# Altium PCB minna_pcb.PcbDoc (part 2 of 2)
Units mil, origin at the board's own origin, x right, y up, seen from the top; angles counter-clockwise.
Board outline 3700 x 2200 mil, 4 copper layers (Top Layer, Power Plane, Ground Plane, Bottom Layer), stack 61.6 mil thick; 144 components, 126 nets, 666 pads, 364 vias.
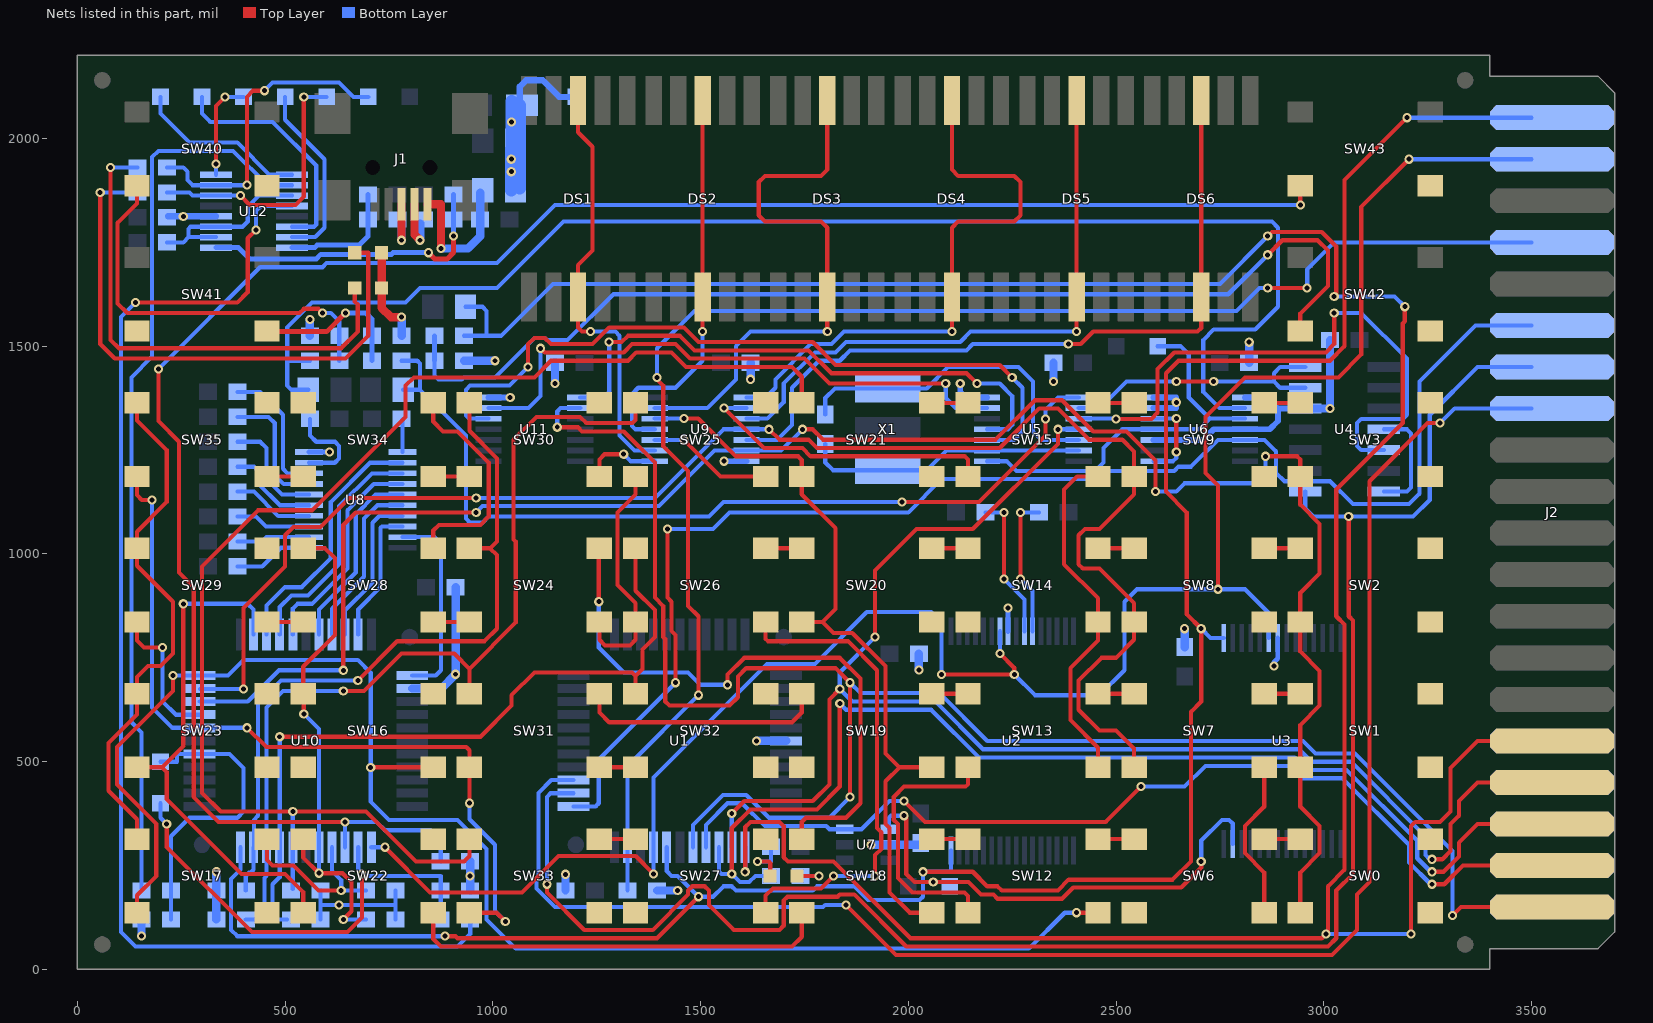
[diagram p4: the nets of this part, all layers, seen from the top]

## Via types
v1: diameter 22, hole 12, Top Layer to Bottom Layer, 364 vias

## Nets (pads, with @x,y where several pads share a name; then routed paths per layer and width w, separated by ;. In a path a pad name is that pad's centre, name@x,y a point inside that pad or via, vN(x,y) a via of type N, cw(c..) or ccw(c..) an arc to the next point about the centre after c; other vN are vias at no path point) (continued)
H\A\L\T\: J2.18 R2.2 U1.14 | length 2736.5
  Top Layer w10: v1(1575,230) 1575,340 1620,385 1780,385 1835,440 v1(1835,640) ; v1(3260,235) 3288,235 3325,272 3325,305 3370,350 J2.18@3500,350
  Bottom Layer w10: U1.14@1544.49,294.09 1544.49,235.51 1550,230 v1(1575,230) 1595,210 1617,210 1632,225 R2.2@1669.57,225 ; v1(1835,640) 1850,625 2055,625 2170,510 2930,510 2960,480 3055,480 3225,310 3225,267.47 3257.47,235 v1(3260,235)
I2CSCL: R30.1 R33.2 TP1.TP U10.5 | length 737.1
  Bottom Layer w10: TP1.TP@200,500 240,500 240,518.5 U10.5@294.09,518.5 366.5,518.5 400,485 400,380 385,365 270,365 225.43,320.43 R33.2@225.43,190 R30.1@225.43,120
I2CSDA: R31.1 R35.2 TP2.TP U10.35 | length 1150.1
  Top Layer w10: v1(215,350) 215,295 420,90 650,90 685,125 v1(685,230)
  Bottom Layer w10: TP2.TP@200,400 200,365 v1(215,350) ; U10.35@675.98,294.09 675.98,239.02 690,225 874.57,225 R31.1@874.57,190 R35.2@874.57,120
I\N\T\: C13.2 J2.16 R29.2 U1.12 | length 6874.8
  Top Layer w10: v1(1607.48,235) 1607.48,342.48 1620,355 1690,355 1700,345 1700,270 1710,260 1820,260 2005,75 2995,75 v1(3005,85) 3010,90 3010,200 3050,240 3050,830 3030,850 3030,1155 3190,1315 3190,1555 3195,1560 v1(3195,1595) ; v1(2865,1765) 2875,1775 2995,1775 3030,1740 3030,1625 v1(3025,1620) ; v1(3210,85) 3210,345 3220,355 3280,355 3305,380 3305,485 3370,550 J2.16@3500,550
  Bottom Layer w10: R29.2@930.43,1525 985,1525 ; C13.2@934.37,1595 975,1595 985,1585 985,1525 ; v1(1607.48,235) U1.12@1607.48,294.09 ; v1(2865,1765) 2750,1650 1145,1650 1020,1525 985,1525 ; v1(3005,85) v1(3210,85) ; v1(3025,1620) 3170,1620 v1(3195,1595)
I\O\R\Q\: J2.20 U1.16 U11.2 | length 4233.9
  Top Layer w10: v1(1155,1305) 1205,1305 1215,1295 1315,1295 1390,1220 1390,895 1410,875 1410,800 1415,795 1415,645 1425,635 1570,635 1590,655 1590,705 1610,725 1825,725 v1(1860,690) v1(1860,415) ; v1(3310,130) 3330,150 J2.20@3500,150
  Bottom Layer w10: v1(1155,1305) 1155,1343 1163.18,1351.18 U11.2@1210.24,1351.18 ; U1.16@1481.5,294.09 1481.5,347.5 1554,420 1610,420 1665,365 1810,365 v1(1860,415) ; v1(1860,690) 1885,665 2075,665 2190,550 2950,550 2980,520 3075,520 3310,285 v1(3310,130)
M\1\: J2.34 U1.24 U4.1 | length 4377.4
  Top Layer w10: v1(1130,205) 1130,185 1220,95 1385,95 1470,180 1470,190 1480,200 1510,200 1520,190 1520,155 1580,95 1690,95 1700,105 1700,165.99 1709.01,175 1830,175 1835,180 1870,180 1995,55 3010,55 3030,75 3030,190 3070,230 3070,840 3060,850 v1(3060,1090)
  Bottom Layer w10: v1(1130,205) 1130,415 1139.02,424.02 U1.24@1194.09,424.02 ; U4.1@2955.51,1150 2955.51,1109.49 2975,1090 v1(3060,1090) 3215,1090 3255,1130 3255,1335 3370,1450 J2.34@3500,1450
M\R\E\Q\: J2.19 U1.15 U7.3 | length 2354.6
  Top Layer w10: v1(1990,405) 2040,355 2475,355 v1(2560,440) ; v1(3260,205) 3290,205 3335,250 J2.19@3500,250
  Bottom Layer w10: U1.15@1512.99,294.09 1512.99,347.99 1565,400 1600,400 1655,345 1802.4,345 1810,337.4 U7.3@1846.85,337.4 1887.4,337.4 1955,405 v1(1990,405) ; v1(2560,440) 2665,440 2715,490 2920,490 2950,460 3045,460 3205,300 3205,257.47 3257.47,205 v1(3260,205)
NetC12_2: C12.2 R27.2 U5.1 | length 2147.2
  Top Layer w10: v1(1985,1125) 2170,1125 2330,1285 v1(2330,1325)
  Bottom Layer w10: R27.2@780.43,1465 818,1465 825,1458 825,1395 ; C12.2@784.37,1395 825,1395 ; v1(1985,1125) 1555,1125 1520,1090 990,1090 975,1075 945,1075 935,1085 935,1285 825,1395 ; v1(2330,1325) 2330,1346.77 2360,1376.77 U5.1@2410.24,1376.77
NetC14_1: C14.1 J1.1 L1.1 | length 350.2
  Top Layer w20: J1.1@842.99,1841.42 875,1841.42 v1(875,1735)
  Bottom Layer w20: v1(875,1735) 940,1735 970,1765 L1.1@970,1869.37
NetC15_1: C15.1 R34.2 U12.8 | length 294.7
  Bottom Layer w12: U12.8@516.54,1737.5 571.5,1737.5 577,1743 678,1743 699.57,1764.57 R34.2@699.57,1805 C15.1@699.57,1865
NetC16_1: C16.1 R32.2 U12.9 | length 741.7
  Top Layer w12: v1(845,1725) 860,1710 890,1710 905.43,1725.43 v1(905.43,1765.43)
  Bottom Layer w12: U12.9@333.46,1737.5 387.5,1737.5 415,1710 575,1710 586,1721 756,1721 760,1725 v1(845,1725) ; v1(905.43,1765.43) R32.2@905.43,1805 C16.1@905.43,1865
NetC17_2: C17.2 U12.3 U12.10 U12.11 | length 445.9
  Bottom Layer w10: C17.2@215.43,1750 255,1750 267.5,1762.5 ; U12.10@333.46,1762.5 267.5,1762.5 ; U12.3@516.54,1862.5 437.5,1862.5 410,1835 410,1800 397.5,1787.5 U12.11@333.46,1787.5 272.5,1787.5 267.5,1782.5 267.5,1762.5
NetC20_2: C20.2 R28.2 U6.2 | length 3390.6
  Bottom Layer w10: C20.2@555.63,1395 515,1395 505,1405 505,1465 ; R28.2@559.57,1465 505,1465 ; U6.2@2810.24,1351.18 2748.82,1351.18 2710,1390 2710,1515 2735,1540 2835,1540 2890,1595 2890,1785 2875,1800 1170,1800 1010,1640 825,1640 790,1605 565,1605 505,1545 505,1465
NetD1_2: D1.2 R2.1 | length 97.1
  Top Layer w10: D1.2@1732.48,225 v1(1785,225)
  Bottom Layer w10: R2.1@1740.43,225 v1(1785,225)
NetD2_2: D2.2 R36.2 | length 1207.5
  Top Layer w10: v1(80,1930) 80,1515 100,1495 635,1495 675,1535 675,1600 667.52,1607.48 D2.2@667.52,1640
  Bottom Layer w10: v1(80,1930) R36.2@144.57,1930
NetD3_2: D3.2 R37.1 | length 1369.3
  Top Layer w10: v1(55,1870) 55,1505 90,1470 645,1470 700,1525 700,1725 D3.2@667.52,1725
  Bottom Layer w10: v1(55,1870) R37.1@144.57,1870
NetDS1_3: DS1.3 DS1.8 U9.2 | length 1023.2
  Top Layer w10: DS1.8@1205,2091.22 1205,2015 1240,1980 1240,1730 1205,1695 DS1.3@1205,1618.78 1205,1545 1215,1535 v1(1235,1535)
  Bottom Layer w10: v1(1235,1535) 1295,1535 1305,1525 1305,1285 1341.18,1248.82 U9.2@1389.76,1248.82
NetDS2_3: DS2.3 DS2.8 U9.4 | length 964.4
  Top Layer w10: v1(1505,1535) DS2.3@1505,1618.78 DS2.8@1505,2091.22
  Bottom Layer w10: U9.4@1389.76,1300 1343,1300 1335,1308 1335,1385 1350,1400 1440,1400 1505,1465 v1(1505,1535)
NetDS3_3: DS3.3 DS3.8 U9.6 | length 1389.3
  Top Layer w10: v1(1805,1535) DS3.3@1805,1618.78 1805,1785 1790,1800 1655,1800 1640,1815 1640,1895 1655,1910 1790,1910 1805,1925 DS3.8@1805,2091.22
  Bottom Layer w10: U9.6@1389.76,1351.18 1516.18,1351.18 1585,1420 1585,1500 1620,1535 v1(1805,1535)
NetDS4_3: DS4.3 DS4.8 U9.8 | length 1423.1
  Top Layer w10: v1(2105,1535) DS4.3@2105,1618.78 2105,1785 2120,1800 2255,1800 2270,1815 2270,1895 2255,1910 2120,1910 2105,1925 DS4.8@2105,2091.22
  Bottom Layer w10: U9.8@1610.24,1376.77 1656.77,1376.77 1680,1400 1680,1420 1765,1505 1815,1505 1845,1535 v1(2105,1535)
NetDS5_3: DS5.3 DS5.8 U9.10 | length 1464.1
  Top Layer w10: v1(2405,1535) DS5.3@2405,1618.78 DS5.8@2405,2091.22
  Bottom Layer w10: U9.10@1610.24,1325.59 1660.59,1325.59 1700,1365 1700,1410 1775,1485 1825,1485 1850,1510 2125,1510 2150,1535 v1(2405,1535)
NetDS6_3: DS6.3 DS6.8 U9.12 | length 1806.3
  Top Layer w10: v1(2385,1505) 2415,1505 2445,1535 2695.96,1535 2705,1544.04 DS6.3@2705,1618.78 DS6.8@2705,2091.22
  Bottom Layer w10: U9.12@1610.24,1274.41 1684.41,1274.41 1720,1310 1720,1400 1785,1465 1835,1465 1860,1490 2140,1490 2155,1505 v1(2385,1505)
NetJ1_2: J1.2 R32.1 | length 132.4
  Top Layer w20: J1.2@811.5,1841.42 811.5,1768.5 v1(825,1755)
  Bottom Layer w20: v1(825,1755) R32.1@825,1795.43
NetJ1_3: J1.3 R34.1 | length 126.9
  Top Layer w20: v1(780,1755) J1.3@780,1841.42
  Bottom Layer w20: v1(780,1755) R34.1@780,1795.43
NetR1_1: R1.1 R27.1 SW41.3 SW41.4 | length 376.5
  Top Layer w12: SW41.4@457.91,1535 600,1535 v1(645,1580)
  Bottom Layer w12: v1(645,1580) 694.57,1580 709.57,1565 R1.1@709.57,1525 R27.1@709.57,1465
NetR3_1: R3.1 R28.1 SW40.3 SW40.4 | length 957
  Top Layer w10: SW40.3@143.5,1886.42 143.5,1843.5 97,1797 97,1603 120,1580 535,1580 545,1590 580,1590 v1(590,1580)
  Bottom Layer w10: v1(590,1580) 610,1580 630.43,1559.57 R3.1@630.43,1525 R28.1@630.43,1465
NetR6_2: R6.2 U2.11 | length 342.9
  Top Layer w10: v1(2270,940) v1(2270,1100)
  Bottom Layer w10: v1(2270,940) 2299.21,910.79 U2.11@2299.21,813.78 ; v1(2270,1100) R6.2@2314.57,1100
NetR7_2: R7.2 U2.10 | length 351.3
  Top Layer w10: v1(2230,940) v1(2230,1100)
  Bottom Layer w10: R7.2@2185.43,1100 v1(2230,1100) ; v1(2230,940) 2279.53,890.47 U2.10@2279.53,813.78
NetR8_1: R8.1 U5.5 X1.3 | length 823.9
  Bottom Layer w10: R8.1@1800,1335.43 1800,1375 1823.43,1398.43 X1.3@1950,1398.43 2044.43,1398.43 2096,1450 2265,1450 2300,1415 2300,1295 2320.59,1274.41 U5.5@2410.24,1274.41
NetR8_2: R8.2 U5.6 U5.9 X1.1 | length 682
  Bottom Layer w10: R8.2@1800,1264.57 1800,1220 1818.43,1201.57 X1.1@1950,1201.57 2044.57,1201.57 2091.82,1248.82 U5.9@2189.76,1248.82 U5.6@2410.24,1248.82
NetR9_1: R9.1 R29.1 SW42.3 SW42.4 | length 2624.3
  Top Layer w10: v1(2865,1720) 2900,1755 2985,1755 3010,1730 3010,1645 2943.5,1578.5 SW42.3@2943.5,1536.42
  Bottom Layer w10: R9.1@859.57,1465 859.57,1429.43 869,1420 925,1420 930,1425 1005,1425 1100,1520 1125,1520 1130,1515 1180,1515 1290,1625 2770,1625 v1(2865,1720)
  Bottom Layer w12: R9.1@859.57,1465 R29.1@859.57,1525
NetR11_1: R11.1 U8.18 | length 329.7
  Bottom Layer w10: R11.1@385.43,1390 440,1390 495,1335 495,1205 506.02,1193.98 U8.18@557.8,1193.98
NetR12_1: R12.1 U8.17 | length 312.5
  Bottom Layer w10: R12.1@385.43,1330 460,1330 475,1315 475,1190 496.61,1168.39 U8.17@557.8,1168.39
NetR13_1: R13.1 U8.16 | length 269
  Bottom Layer w10: R13.1@385.43,1270 440,1270 455,1255 455,1180 492.2,1142.8 U8.16@557.8,1142.8
NetR14_1: R14.1 U8.15 | length 228.4
  Bottom Layer w10: R14.1@385.43,1210 425,1210 435,1200 435,1170 487.8,1117.2 U8.15@557.8,1117.2
NetR15_1: R15.1 U8.14 | length 196.5
  Bottom Layer w10: R15.1@385.43,1150 425,1150 483.39,1091.61 U8.14@557.8,1091.61
NetR16_1: R16.1 U8.13 | length 182.3
  Bottom Layer w10: R16.1@385.43,1090 430,1090 453.98,1066.02 U8.13@557.8,1066.02
NetR17_1: R17.1 U8.12 | length 176.7
  Bottom Layer w10: R17.1@385.43,1030 445,1030 455.43,1040.43 U8.12@557.8,1040.43
NetR18_1: R18.1 U8.11 | length 190.9
  Bottom Layer w10: R18.1@385.43,970 445,970 489.84,1014.84 U8.11@557.8,1014.84
NetR25_1: R25.1 U8.1 | length 78.1
  Bottom Layer w10: U8.1@782.2,1245.16 R25.1@782.2,1323.23
NetR26_1: R26.1 U8.19 | length 227.1
  Bottom Layer w10: U8.19@557.8,1219.57 619.57,1219.57 630.01,1230.01 630.01,1259.99 620,1270 575,1270 559.57,1285.43 R26.1@559.57,1325
NetR33_1: R33.1 U12.2 | length 2172.8
  Bottom Layer w10: R33.1@154.57,190 154.57,570.43 130,595 130,1425 180,1475 180,1955 195,1970 375,1970 457.5,1887.5 U12.2@516.54,1887.5
NetR35_1: R35.1 U12.4 | length 3007
  Top Layer w10: v1(140,1605) 385,1605 410,1630 410,1760 v1(430,1780)
  Bottom Layer w10: v1(140,1605) 105,1570 105,90 140,55 915,55 945.43,85.43 R35.1@945.43,120 ; v1(430,1780) 430,1825 442.5,1837.5 U12.4@516.54,1837.5
NetR36_1: R36.1 TP3.TP U12.15 | length 755.1
  Top Layer w10: v1(407.98,1888.03) 407.98,2100 422.98,2115 v1(450,2115)
  Bottom Layer w10: R36.1@215.43,1930 255,1930 265,1920 265,1900 277.5,1887.5 U12.15@333.46,1887.5 407.46,1887.5 v1(407.98,1888.03) ; v1(450,2115) 470,2135 630,2135 665,2100 TP3.TP@700,2100
NetR37_2: R37.2 TP4.TP U12.14 | length 645.3
  Top Layer w10: v1(392.5,1862.5) 415,1840 525,1840 545,1860 v1(545,2100)
  Bottom Layer w10: R37.2@215.43,1870 270,1870 277.5,1862.5 U12.14@333.46,1862.5 v1(392.5,1862.5) ; v1(545,2100) TP4.TP@600,2100
NetTP5_TP: TP5.TP U12.7 | length 442.1
  Bottom Layer w10: TP5.TP@500,2100 500,2045 595,1950 595,1785 572.5,1762.5 U12.7@516.54,1762.5
NetTP6_TP: TP6.TP U12.16 | length 241.4
  Top Layer w10: v1(333.46,1938.46) 333.46,2078.46 v1(355,2100)
  Bottom Layer w10: U12.16@333.46,1912.5 v1(333.46,1938.46) ; v1(355,2100) TP6.TP@400,2100
NetTP7_TP: TP7.TP U12.6 | length 569.5
  Bottom Layer w10: TP7.TP@300,2100 300,2060 320,2040 470,2040 575,1935 575,1793 569.5,1787.5 U12.6@516.54,1787.5
NetTP8_TP: TP8.TP U12.1 | length 417.6
  Bottom Layer w10: TP8.TP@200,2100 200,2060 270,1990 385,1990 462.5,1912.5 U12.1@516.54,1912.5
NetTP9_TP: TP9.TP U5.8 U6.3 U6.11 | length 961.3
  Bottom Layer w10: U5.8@2189.76,1223.23 2236.77,1223.23 2260,1200 2450,1200 2470,1220 2470,1255 2515,1300 U6.11@2589.76,1300 2700,1300 2725.59,1325.59 ; TP9.TP@2600,1500 2655,1500 2675,1480 2675,1376.18 2725.59,1325.59 ; U6.3@2810.24,1325.59 2725.59,1325.59
NetU4_6: U4.6 U4.7 U5.2 | length 679.6
  Top Layer w10: v1(2645,1415) v1(2735,1415)
  Bottom Layer w10: U5.2@2410.24,1351.18 2461.18,1351.18 2525,1415 v1(2645,1415) ; v1(2735,1415) 2880,1415 ; U4.6@2955.51,1400 2895,1400 2880,1415 ; U4.7@2955.51,1450 2895,1450 2880,1435 2880,1415
NetU4_11: U4.11 U4.14 | length 269.3
  Bottom Layer w10: U4.14@3144.49,1150 3200,1150 3210,1160 3210,1290 3200,1300 U4.11@3144.49,1300
NetU4_12: U4.12 U5.3 | length 1433.6
  Top Layer w10: v1(2500,1325) 2585,1325 2600,1340 2600,1445 2640,1485 3005,1485 3025,1505 v1(3025,1580)
  Bottom Layer w10: U5.3@2410.24,1325.59 2499.41,1325.59 v1(2500,1325) ; v1(3025,1580) 3090,1580 3200,1470 3200,1335 3190,1325 3090,1325 3080,1315 3080,1260 3090,1250 U4.12@3144.49,1250
NetU5_10: U5.10 U11.12 | length 1825.4
  Top Layer w10: v1(1085,1450) 1085,1505 1100,1520 1125,1520 1140,1505 1240,1505 1280,1545 1460,1545 1495,1510 1770,1510 1825,1455 2220,1455 v1(2250,1425)
  Bottom Layer w10: U11.12@989.76,1325.59 942.41,1325.59 935,1333 935,1395 945,1405 1040,1405 v1(1085,1450) ; U5.10@2189.76,1274.41 2254.41,1274.41 2275,1295 2275,1400 v1(2250,1425)
NetU5_11: U5.11 U11.1 | length 1365.9
  Top Layer w10: v1(1280,1510) 1310,1510 1325,1525 1450,1525 1485,1490 1760,1490 1815,1435 2140,1435 v1(2165,1410)
  Bottom Layer w10: U11.1@1210.24,1376.77 1266.77,1376.77 1280,1390 v1(1280,1510) ; v1(2165,1410) 2220,1410 2250,1380 2250,1310 2240,1300 U5.11@2189.76,1300
NetU5_13: U5.13 U11.13 | length 1423.6
  Top Layer w10: v1(1115,1495) 1125,1485 1315,1485 1335,1505 1440,1505 1475,1470 1750,1470 1810,1410 v1(2090,1410)
  Bottom Layer w10: U11.13@989.76,1351.18 1086.18,1351.18 1115,1380 v1(1115,1495) ; v1(2090,1410) 2090,1375 2113.82,1351.18 U5.13@2189.76,1351.18
NetU6_8: U6.8 U6.12 | length 208.9
  Top Layer w10: v1(2645,1245) v1(2645,1325.59)
  Bottom Layer w10: U6.8@2589.76,1223.23 2637.23,1223.23 2645,1231 v1(2645,1245) ; U6.12@2590.35,1325.59 U6.12@2589.76,1325.59 v1(2645,1325.59)
NetU8_2: U8.2 U10.14 | length 617.9
  Bottom Layer w10: U10.14@455.51,805.91 455.51,875.51 500,920 540,920 610,990 610,1125 704.57,1219.57 U8.2@782.2,1219.57
NetU8_3: U8.3 U10.15 | length 576.7
  Bottom Layer w10: U10.15@487.01,805.91 487.01,872.01 515,900 555,900 630,975 630,1115 708.98,1193.98 U8.3@782.2,1193.98
NetU8_4: U8.4 U10.16 | length 532.5
  Bottom Layer w10: U10.16@518.5,805.91 518.5,868.5 530,880 565,880 650,965 650,1105 713.39,1168.39 U8.4@782.2,1168.39
NetU8_5: U8.5 U10.18 | length 457.8
  Bottom Layer w10: U10.18@581.5,805.91 581.5,866.5 670,955 670,1095 717.8,1142.8 U8.5@782.2,1142.8
NetU8_6: U8.6 U10.19 | length 416.5
  Bottom Layer w10: U10.19@612.99,805.91 612.99,867.99 690,945 690,1085 722.2,1117.2 U8.6@782.2,1117.2
NetU8_7: U8.7 U10.20 | length 375.3
  Bottom Layer w10: U10.20@644.49,805.91 644.49,864.49 710,930 710,1075 726.61,1091.61 U8.7@782.2,1091.61
NetU8_8: U8.8 U10.21 | length 332.9
  Bottom Layer w10: U10.21@675.98,805.91 675.98,865.98 730,920 730,1063 733.02,1066.02 U8.8@782.2,1066.02
NetU8_9: U8.9 U10.23 | length 478.5
  Bottom Layer w10: U8.9@782.2,1040.43 859.57,1040.43 875,1025 875,720 862.48,707.48 U10.23@805.91,707.48
NMI: J2.17 U1.13 U5.4 | length 3552.4
  Top Layer w10: v1(1575,375) 1605,405 1770,405 1810,445 1810,650 v1(1835,675) ; v1(1920,800) 1920,960 2020,1060 2155,1060 2360,1265 v1(2360,1300) ; v1(3260,265) 3285,265 3305,285 3305,350 3325,370 3325,405 3370,450 J2.17@3500,450
  Bottom Layer w10: U1.13@1575,295.08 v1(1575,375) ; v1(1920,800) 1835,715 v1(1835,675) 1865,645 2065,645 2180,530 2940,530 2970,500 3065,500 3245,320 3245,275 3255,265 v1(3260,265) ; v1(2360,1300) U5.4@2410.24,1300
PA0: R19.1 SW0.1 SW0.2 SW6.1 SW6.2 SW12.1 SW12.2 SW18.1 SW18.2 SW24.1 SW24.2 SW30.1 SW30.2 U10.43 | length 3479.4
  Top Layer w10: v1(675,695) 770,790 980,790 1010,820 1010,997.16 993.58,1013.58 ; SW24.1@943.5,1013.58 993.58,1013.58 ; SW30.1@943.5,1363.58 943.5,1296.5 1010,1230 1010,1030 993.58,1013.58 ; v1(1255,885) SW24.2@1255,1015 ; v1(1565,685) 1565,710 1605,750 1835,750 1885,700 1885,400 1850,365 1754,365 1743.5,354.5 SW18.1@1743.5,313.58 ; SW18.2@2056.5,313.58 SW12.1@2143.5,313.58 ; SW12.2@2456.5,313.58 SW6.1@2543.5,313.58 ; SW6.2@2856.5,313.58 SW0.1@2943.5,313.58
  Bottom Layer w10: R19.1@405.43,190 405.43,225.43 413,233 417,233 424.02,240.02 U10.43@424.02,294.09 ; U10.43@425,295.08 425,360 435,370 435,640 490,695 v1(675,695) ; v1(1255,885) 1255,775 1315,715 1470,715 1500,685 v1(1565,685)
PA1: R20.1 SW1.1 SW1.2 SW7.1 SW7.2 SW13.1 SW13.2 SW19.1 SW19.2 SW25.1 SW25.2 SW31.1 SW31.2 U10.42 | length 2994
  Top Layer w10: v1(640,670) 690,670 780,760 907.01,760 943.5,723.5 ; SW31.1@943.5,663.58 943.5,723.5 ; SW31.2@1256.5,663.58 1256.5,618.5 1280,595 1720,595 1743.5,618.5 SW19.1@1743.5,663.58 ; SW25.1@1343.5,1363.58 1343.5,1322.5 1336,1315 1225,1315 1210,1330 1105,1330 1050,1275 1050,1035 1055,1030 1055,835 943.5,723.5 ; SW19.2@2056.5,663.58 SW13.1@2143.5,663.58 ; SW13.2@2456.5,663.58 SW7.1@2543.5,663.58 ; SW7.2@2856.5,663.58 SW1.1@2943.5,663.58
  Bottom Layer w10: R20.1@405.43,120 443,120 450,127 450,220 455.51,225.51 U10.42@455.51,294.09 455.51,630.51 495,670 v1(640,670)
PA2: R21.1 SW2.1 SW2.2 SW8.1 SW8.2 SW14.1 SW14.2 SW20.1 SW20.2 SW26.1 SW26.2 SW32.1 SW32.2 U10.41 | length 2152.9
  Top Layer w10: v1(487.01,560) 970,560 1045,635 1045,660 1100,715 1335,715 1343.5,706.5 ; SW32.1@1343.5,663.58 1343.5,706.5 ; SW26.1@1343.5,1013.58 1343.5,911.5 1390,865 1390,800 1360,770 1360,722.99 1343.5,706.5 ; SW26.2@1656.5,1013.58 SW20.1@1743.5,1013.58 ; SW20.2@2056.5,1013.58 SW14.1@2143.5,1013.58 ; SW14.2@2456.5,1013.58 SW8.1@2543.5,1013.58 ; SW8.2@2856.5,1013.58 SW2.1@2943.5,1013.58
  Bottom Layer w10: v1(487.01,560) U10.41@487.01,294.09 487.01,222.01 470,205 470,127 477,120 R21.1@504.57,120
PA3: R22.1 SW3.1 SW3.2 SW9.1 SW9.2 SW15.1 SW15.2 SW21.1 SW21.2 SW27.1 SW27.2 SW33.1 SW33.2 U10.40 | length 3625.1
  Top Layer w10: SW33.1@943.5,313.58 943.5,272.5 931,260 815,260 695,380 v1(518.5,380) 345,380 300,425 300,970 435,1105 565,1105 790,1330 790,1405 810,1425 1100,1425 1140,1465 1325,1465 1345,1485 1430,1485 1465,1450 1720,1450 1743.5,1426.5 SW21.1@1743.5,1363.58 ; SW33.2@1256.5,313.58 SW27.1@1343.5,313.58 ; SW21.2@2056.5,1363.58 SW15.1@2143.5,1363.58 ; SW15.2@2456.5,1363.58 SW9.1@2543.5,1363.58 ; SW9.2@2856.5,1363.58 SW3.1@2943.5,1363.58
  Bottom Layer w10: R22.1@518.5,193.94 U10.40@518.5,294.09 v1(518.5,380)
PA4: R23.1 SW16.1 SW16.2 SW22.1 SW22.2 SW28.1 SW28.2 SW34.1 SW34.2 U10.38 | length 1770.8
  Top Layer w10: SW22.1@543.5,313.58 543.5,269.49 v1(581.5,231.5) ; SW16.1@543.5,663.58 543.5,728.5 620,805 620,990 596.42,1013.58 SW28.1@543.5,1013.58 ; v1(545,615) SW16.1@545,662.09 ; v1@578.5,231.5 v1(581.5,231.5) ; v1(640,120) 660,140 660,210 638.5,231.5 v1(581.5,231.5) ; SW28.2@856.5,1013.58 856.5,1056.5 870,1070 970,1070 990,1090 990,1220 915,1295 880,1295 856.5,1318.5 SW34.2@856.5,1363.58
  Bottom Layer w10: v1(545,615) 581.5,578.5 U10.38@581.5,294.09 v1(581.5,231.5) ; v1(640,120) R23.1@694.57,120
PA5: R24.1 SW17.1 SW17.2 SW23.1 SW23.2 SW29.1 SW29.2 SW35.1 SW35.2 U10.37 | length 1687
  Top Layer w10: SW17.1@143.5,313.58 143.5,361.5 75,430 75,545 143.5,613.5 SW23.1@143.5,663.58 143.5,703.5 170,730 200,730 230,760 230,885 143.5,971.5 SW29.1@143.5,1013.58 143.5,1053.5 215,1125 215,1250 143.5,1321.5 SW35.1@143.5,1363.58 ; SW17.2@456.5,313.58 456.5,263.5 470,250 520,250 580,190 v1(635,190)
  Bottom Layer w10: U10.37@612.99,294.09 612.99,237.01 635,215 v1(635,190) R24.1@694.57,190
PC0: SW0.3 SW0.4 SW1.3 SW1.4 SW2.3 SW2.4 SW3.3 SW3.4 U9.13 U10.9 | length 4587.2
  Top Layer w10: v1(640,720) 640,1070 670,1100 v1(960,1100) ; v1(1745,1300) 1770,1300 1795,1275 1940,1275 2210,1275 2305,1370 2370,1370 2445,1295 2525,1295 2595,1225 v1(2595,1150) ; v1(2860,1235) 2936,1235 2943.5,1227.5 SW3.3@2943.5,1186.42 2943.5,1118.5 2990,1072.01 2990,952.99 2943.5,906.5 SW2.3@2943.5,836.42 2943.5,765 2990,718.5 2990,635 2943.5,588.5 SW1.3@2943.5,486.42 2943.5,391.5 2990,345 2990,280 2943.5,233.5 SW0.3@2943.5,136.42
  Bottom Layer w10: U10.9@294.61,645 410,645 485,720 v1(640,720) ; v1(960,1100) 975,1115 1400,1115 1533.82,1248.82 U9.13@1610.24,1248.82 1693.82,1248.82 v1(1745,1300) ; v1(2595,1150) 2645,1150 2665,1170 2850,1170 2860,1180 v1(2860,1235)
PC1: SW6.3 SW6.4 SW7.3 SW7.4 SW8.3 SW8.4 SW9.3 SW9.4 U9.11 U10.10 | length 4224
  Top Layer w10: v1(400,675) 400,870 500,970 500,1045 520,1065 585,1065 655,1135 v1(960,1135) ; v1(1665,1300) 1690,1275 1760,1275 1780,1255 2220,1255 2315,1350 2360,1350 2435,1275 2515,1275 2543.5,1246.5 SW9.3@2543.5,1186.42 2543.5,1143.5 2460,1060 2425,1060 2410,1045 2410,975 2420,965 2460,965 2543.5,881.5 SW8.3@2543.5,836.42 2543.5,793.5 2500,750 2465,750 2410,695 2410,625 2460,575 2500,575 2543.5,531.5 SW7.3@2543.5,486.42 ; SW6.4@2856.5,136.42 2856.5,233.5 2810,280 2810,345 2856.5,391.5 SW7.4@2856.5,486.42
  Bottom Layer w10: U10.10@295.08,675 v1(400,675) ; v1(960,1135) 1390,1135 1555,1300 U9.11@1610.24,1300 v1(1665,1300)
PC2: SW12.3 SW12.4 SW13.3 SW13.4 SW14.3 SW14.4 SW15.3 SW15.4 SW16.3 SW16.4 SW17.3 SW17.4 U9.9 U10.11 | length 5927.6
  Top Layer w10: SW17.3@143.5,136.42 143.5,178.5 190,225 190,350 95,445 95,535 230,670 v1(230,707.48) ; v1(706,486.42) SW16.4@856.5,486.42 ; v1(1556.18,1351.18) 1652.36,1255 1745,1255 1765,1235 2136,1235 2143.5,1227.5 SW15.3@2143.5,1186.42 ; v1@1560,1350 v1@1560,1351.18 ; SW12.3@2143.5,136.42 2143.5,176.5 2135,185 2010,185 1975,220 1975,350 1965,360 1965,415 1990,440 2138,440 2143.5,445.5 SW13.3@2143.5,486.42 ; v1(2405,136.42) SW12.4@2456.5,136.42 ; SW13.4@2456.5,486.42 2456.5,533.5 2390,600 2390,725 2456.5,791.5 SW14.4@2456.5,836.42 2456.5,893.5 2375,975 2375,1155 2406.42,1186.42 SW15.4@2456.5,1186.42
  Bottom Layer w10: v1(230,707.48) U10.11@294.09,707.48 362.48,707.48 400,745 675,745 706,714 v1(706,486.42) 706,404 750,360 915,360 985,290 985,120 1055,50 2290,50 2376.42,136.42 v1(2405,136.42) ; v1(1556.18,1351.18) U9.9@1610.24,1351.18
PC3: SW18.3 SW18.4 SW19.3 SW19.4 SW20.3 SW20.4 SW21.3 SW21.4 SW22.3 SW22.4 SW23.3 SW23.4 U9.5 U10.13 | length 4141.1
  Top Layer w10: SW23.3@143.5,486.42 203.58,486.42 ; v1(255,880) 255,537.84 203.58,486.42 ; SW22.3@543.5,136.42 543.5,186.5 500,230 395,230 215,410 215,475 203.58,486.42 ; SW22.4@856.5,136.42 856.5,73.5 875,55 1720,55 1743.5,78.5 SW18.3@1743.5,136.42 ; v1(1460,1325.59) 1494.41,1325.59 1585,1235 1735,1235 1743.5,1226.5 SW21.3@1743.5,1186.42 1743.5,1143.5 1825,1062.01 1825,867.84 1793.58,836.42 ; SW20.3@1743.5,836.42 1793.58,836.42 ; SW18.4@2056.5,136.42 2003.58,136.42 1955,185 1955,340 1945,350 1945,452.84 1978.58,486.42 ; SW19.4@2056.5,486.42 1978.58,486.42 ; 1793.58,836.42 1820,810 1865,810 1945,730 1945,520 1978.58,486.42
  Bottom Layer w10: v1(255,880) 410,880 424.02,865.98 U10.13@424.02,805.91 ; U9.5@1389.76,1325.59 v1(1460,1325.59)
PC4: SW24.3 SW24.4 SW25.3 SW25.4 SW26.3 SW26.4 SW27.3 SW27.4 SW28.3 SW28.4 SW29.3 SW29.4 U9.3 U10.8 | length 2563.2
  Top Layer w10: SW29.3@143.5,836.42 143.5,791.5 160,775 v1(205,775) ; SW29.4@456.5,836.42 SW28.3@543.5,836.42 ; SW28.4@856.5,836.42 SW24.3@943.5,836.42 ; SW24.4@1256.5,836.42 1256.5,793.5 1270,780 1330,780 1343.5,793.5 SW26.3@1343.5,836.42 1343.5,881.5 1300,925 1300,1100 1343.5,1143.5 SW25.3@1343.5,1186.42 ; v1(1460,1274.41) 1547.99,1186.42 SW25.4@1656.5,1186.42 ; SW27.4@1656.5,136.42 1656.5,177.5 1674,195 1790,195 v1(1820,225) ; SW26.4@1656.5,836.42 1656.5,795.5 1662,790 1855,790 1925,720 1925,340 1935,330 1935,290 1920,275 v1(1920,225)
  Bottom Layer w10: v1(205,775) 205,645 237.01,612.99 U10.8@294.09,612.99 ; U9.3@1389.76,1274.41 v1(1460,1274.41) ; v1(1820,225) v1(1920,225)
PC5: SW30.3 SW30.4 SW31.3 SW31.4 SW32.3 SW32.4 SW33.3 SW33.4 SW34.3 SW34.4 SW35.3 SW35.4 U9.1 U10.7 | length 2383.3
  Top Layer w10: SW35.3@143.5,1186.42 143.5,1141.5 155,1130 v1(180,1130) ; v1(408.5,581.5) 455,535 936,535 943.5,527.5 SW31.3@943.5,486.42 v1(943.5,400) ; SW35.4@456.5,1186.42 SW34.3@543.5,1186.42 ; SW34.4@856.5,1186.42 SW30.3@943.5,1186.42 ; SW33.3@943.5,136.42 1008.58,136.42 v1(1030,115) ; SW31.4@1256.5,486.42 SW32.3@1343.5,486.42 ; SW30.4@1256.5,1186.42 1256.5,1227.5 1269,1240 v1(1315,1240)
  Bottom Layer w10: v1(180,1130) 180,630 228.5,581.5 U10.7@294.09,581.5 v1(408.5,581.5) ; v1(943.5,400) 943.5,361.5 1005,300 1005,140 v1(1030,115) ; v1(1315,1240) 1331.77,1223.23 U9.1@1389.76,1223.23
R\D\: J2.40 U1.18 U2.32 U3.1 U10.44 | length 5641.1
  Top Layer w10: v1(885,80) 910,80 915,75 1395,75 v1(1495,175) ; v1(2035,235) 2155,235 2190,200 2215,200 2225,190 2360,190 2386,216 2636,216 2680,260 2680,620 2705,645 v1(2705,820) 2670,855 2670,1100 2620,1150 2620,1435 2650,1465 3015,1465 3050,1500 3050,1900 v1(3200,2050)
  Bottom Layer w10: U10.44@392.52,294.09 392.52,240.52 370,218 370,95 385,80 v1(885,80) ; U1.18@1418.5,294.09 1418.5,236.5 1430,225 1445,225 v1(1495,175) 1530,175 1555,200 1575,200 1585,190 1770,190 1780,200 1870,200 1903,167 2027,167 2035,175 v1(2035,235) 2100,235 2102.36,237.36 U2.32@2102.36,286.22 ; v1(2705,820) 2726.97,798.03 U3.1@2759.25,798.03 ; v1(3200,2050) J2.40@3500,2050
R\F\S\H\: J2.33 U1.25 | length 3954
  Top Layer w10: v1(1850,155) 1970,35 3020,35 3080,95 3080,180 3110,210 3110,1175 3250,1315 v1(3280,1315)
  Bottom Layer w10: U1.25@1194.09,455.51 1140.51,455.51 1110,425 1110,225 1105,220 1105,195 1150,150 1795,150 1800,155 v1(1850,155) ; v1(3280,1315) 3315,1350 J2.33@3500,1350
R\S\T\: J2.35 U1.23 U6.5 | length 3408.4
  Top Layer w10: v1(1420,1060) 1420,895 1430,885 1430,815 1440,805 v1(1440,690)
  Bottom Layer w10: U1.23@1194.09,392.52 1247.52,392.52 1255,400 1255,505 v1(1440,690) ; v1(1420,1060) 1530,1060 1570,1100 2000,1100 2080,1180 2460,1180 2480,1200 2640,1200 2650,1210 2680.59,1210 2745,1274.41 U6.5@2810.24,1274.41 2857.59,1274.41 2885,1247 2885,1195 2905,1175 3015,1175 3070,1120 3205,1120 3230,1145 3230,1415 3365,1550 J2.35@3500,1550
RAMC\E\: TP11.TP U3.27 U7.4 | length 1229
  Top Layer w10: v1(1990,370) 1995,365 1995,230 2015,210 v1(2060,210) 2145,210 2175,180 2205,180 2215,170 2370,170 2397,197 2657,197 2705,245 v1(2705,260)
  Bottom Layer w10: U7.4@1953.15,337.4 1953.15,365.15 1958,370 v1(1990,370) ; v1(2060,210) TP11.TP@2100,210 ; v1(2705,260) 2705,310 2755,360 2772,360 2780.91,351.09 U3.27@2780.91,301.97
USER: R10.1 SW43.3 SW43.4 U10.36 | length 4773
  Top Layer w10: v1(195,1445) 195,1320 245,1270 245,955 280,920 280,415 340,355 v1(644.49,355) ; v1(2943.5,1840) SW43.3@2943.5,1886.42
  Bottom Layer w10: v1(195,1445) 440,1690 590,1690 600,1700 1010,1700 1150,1840 v1(2943.5,1840) ; U10.36@644.49,294.09 v1(644.49,355) 720,355 740,335 850,335 874.57,310.43 R10.1@874.57,260
VCC: C1.2 C2.2 C3.2 C4.2 C5.2 C6.2 C7.2 C8.2 C9.2 C10.2 C11.2 C18.1 C19.1 D1.1 D2.1 D3.1 L1.2 R1.2 R3.2 R4.1 R5.1 R9.2 R10.2 R19.2 R20.2 R21.2 R22.2 R23.2 R24.2 R30.2 R31.2 TP13.TP U1.6 U2.8 U3.7 U4.5 U5.14 U6.1 U6.4 U6.10 U6.13 U6.14 U7.5 U8.20 U9.14 U10.24 U11.14 U12.12 | length 3850.3
  Top Layer w10: v1(1637,260) 1664.04,260 1667.52,256.52 D1.1@1667.52,225
  Top Layer w20: D3.1@732.48,1725 D2.1@732.48,1640 732.48,1592.52 755,1570 v1(780.43,1570)
  Bottom Layer w10: R21.2@585.43,120 585.43,155 ; R22.2@585.43,190 585.43,155 ; R23.2@765.43,120 765.43,155 ; R24.2@765.43,190 765.43,155 ; v1(1637,260) 1669.57,260 C1.2@1669.57,295 ; 585.43,155 v1(630,155) 765.43,155
  Bottom Layer w12: U8.20@557.8,1245.16 v1@607.01,1245.16 ; U2.8@2240.16,813.78 v1(2240.16,869.84) ; v1(2880,730) 2880,739 2889.17,748.17 U3.7@2889.17,798.03
  Bottom Layer w14: U11.14@989.76,1376.77 v1(1041.77,1376.77) ; v1(1556.77,1223.23) U9.14@1610.24,1223.23 ; v1(2125,1410) 2125,1390 2138.23,1376.77 U5.14@2189.76,1376.77 ; U6.10@2589.76,1274.41 2709.41,1274.41 2735,1300 U6.4@2810.24,1300 2870,1300 2890,1320 2890,1350 ; U6.13@2589.76,1351.18 2645,1351.18 v1(2645,1365) 2645,1376.77 U6.14@2589.76,1376.77 ; U6.1@2810.24,1376.77 2863.23,1376.77 2890,1350 ; U4.5@2955.51,1350 2890,1350
  Bottom Layer w15: C8.2@217.93,1812.5 U12.12@333.46,1812.5 ; C19.1@1065,2090 1065,2125 1080,2140 1120,2140 1160,2100 TP13.TP@1200,2100
  Bottom Layer w20: v1(154.57,80.43) R30.2@154.57,120 ; R20.2@334.57,120 R19.2@334.57,190 v1(334.57,235) ; R3.2@559.57,1525 v1(559.57,1564.57) ; R1.2@780.43,1525 v1(780.43,1570) ; U10.24@805.91,675.98 875.98,675.98 v1(910.43,710.43) C10.2@910.43,920 ; R9.2@930.43,1465 v1(1005,1465) ; R31.2@945.43,190 R10.2@945.43,260 ; v1(1149.57,1410.43) C11.2@1149.57,1460 ; R5.1@1175,190.43 v1(1175,229) ; R4.1@1395.43,190 v1(1445,190) ; v1(1620.43,1420.43) C9.2@1620.43,1460 ; v1(1635,550) U1.6@1705.91,550 ; v1(1910,300) U7.5@1953.15,300 C7.2@2025,300 ; v1(2025.43,720.43) C2.2@2025.43,760 ; v1(2349.57,1415.43) C5.2@2349.57,1460 ; C3.2@2665,775.43 v1(2665,820) ; C6.2@2820.43,1460 v1(2820.43,1509.57) ; U4.5@2955.51,1350 v1(3015,1350) C4.2@3015,1514.57
  Bottom Layer w30: L1.2@1044.37,1875 C18.1@1044.37,1975 ; C18.1@1045,1980.75 C19.1@1045,2090 ; L1.2@1065,1880 C19.1@1065,2080
  other v1: 945.43,225 607.01,1245 255,1812.5 1044.37,1920 1044.37,1950 1045,2040
W\A\I\T\: J2.37 R4.2 U1.21 | length 3648.7
  Top Layer w10: v1@1395,1420 1410,1405 1410,1260 1470,1200 1470,875 1495,850 v1(1495,660) ; v1(2865,1640) v1(2960,1640)
  Bottom Layer w10: R4.2@1324.02,190.55 U1.21@1324.02,294.09 1324.02,489.02 v1(1495,660) ; v1(1395,1425) 1395,1495 1485,1585 2790,1585 2845,1640 v1(2865,1640) ; v1(2960,1640) 2960,1685 3025,1750 J2.37@3500,1750
W\R\: J2.39 U1.19 U2.7 U3.6 U10.34 | length 4893.2
  Top Layer w10: v1(740,294.09) 849.09,185 1070,185 1158,273 1344.01,273 v1(1387.01,230) ; v1(2080,710) v1(2255,710) 2255,725.94 v1(2220.47,760.47) ; v1(2745,915) 2745,1165 2715,1195 2715,1330 2810,1425 3035,1425 3090,1480 3090,1835 v1(3205,1950)
  Bottom Layer w10: U10.34@707.48,294.09 v1(740,294.09) ; v1(1387.01,230) U1.19@1387.01,294.09 1387.01,462.01 1660,735 1775,735 1900,860 2055,860 2080,835 v1(2080,710) ; v1(2220.47,760.47) U2.7@2220.47,813.78 ; v1(2255,710) 2305,660 2460,660 2520,720 2520,885 2550,915 v1(2745,915) 2810,915 2867.52,857.48 U3.6@2867.52,798.03 ; v1(3205,1950) J2.39@3500,1950
pads on no net: FID1.FID FID2.FID FID3.FID FID4.FID FID5.FID FID6.FID FID7.FID FID8.FID FID9.FID FID10.FID FID11.FID FID12.FID J1.MH1 J1.MH2 J2.11 U1.11 U1.17 U1.33 U1.39 U2.6 U2.9 U4.4 U4.8 U4.9 U4.13 U10.12 U10.17 U10.22 U10.39 U11.6 U11.8

## Polygon pours and split planes (outlines as drawn)
VCC on Power Plane (split plane): 3379.9,2150 3380.29,2146.08 3381.43,2142.31 3383.29,2138.83 3385.79,2135.79 3388.83,2133.29 3392.31,2131.43 3396.08,2130.29 3400,2129.9 3651.68,2129.9 3679.9,2101.68 3679.9,98.32 3651.68,70.1 3400,70.1 3396.08,69.71 3392.31,68.57 3388.83,66.71 3385.79,64.21 3383.29,61.17 3381.43,57.69 3380.29,53.92 3379.9,50 3379.9,20.1 20.1,20.1 20.1,2179.9 3379.9,2179.9
GND on Ground Plane (split plane): 3379.9,2150 3380.29,2146.08 3381.43,2142.31 3383.29,2138.83 3385.79,2135.79 3388.83,2133.29 3392.31,2131.43 3396.08,2130.29 3400,2129.9 3651.68,2129.9 3679.9,2101.68 3679.9,98.32 3651.68,70.1 3400,70.1 3396.08,69.71 3392.31,68.57 3388.83,66.71 3385.79,64.21 3383.29,61.17 3381.43,57.69 3380.29,53.92 3379.9,50 3379.9,20.1 20.1,20.1 20.1,2179.9 3379.9,2179.9

## Keep-outs
Keep-Out Layer:
  text ".Layer_Name" at 0,-600 h100
  text ".ProjectTitle" at 0,-800 h100
  text ".ProjectRevision" at 0,-1000 h100

## Other copper
Top Layer:
  text "C HETTRICK" at 1670,1825 h60
  text ".Layer_Name" at 0,-600 h100
  text ".ProjectTitle" at 0,-800 h100
  text ".ProjectRevision" at 0,-1000 h100
Bottom Layer:
  text "POPULATE ALL THE RESISTORS" at 2800,2050 h60
  text "v0.1" at 875,1975 h60
  text ".Layer_Name" at 0,-600 h100
  text ".ProjectTitle" at 0,-800 h100
  text ".ProjectRevision" at 0,-1000 h100
Power Plane (plane layer: these items are gaps in the copper):
  text ".Layer_Name" at 0,-600 h100
  text ".ProjectTitle" at 0,-800 h100
  text ".ProjectRevision" at 0,-1000 h100
Ground Plane (plane layer: these items are gaps in the copper):
  text ".Layer_Name" at 0,-600 h100
  text ".ProjectTitle" at 0,-800 h100
  text ".ProjectRevision" at 0,-1000 h100

## Silkscreen, mask and mechanical layers (free items; w line width, h text height)
Top Overlay:
  text ".Layer_Name" at 0,-600 h100
  text ".ProjectTitle" at 0,-800 h100
  text ".ProjectRevision" at 0,-1000 h100
Bottom Overlay:
  text "TP3-TP8" at 650,1960 h60
  text "smari" at 2800,1800 h300
  text "minna v0.1" at 2020,1660 h60
  text "2012-08-06 r69" at 3200,60 h60
  text ".Layer_Name" at 0,-600 h100
  text ".ProjectTitle" at 0,-800 h100
  text ".ProjectRevision" at 0,-1000 h100
Top Paste:
  text ".Layer_Name" at 0,-600 h100
  text ".ProjectTitle" at 0,-800 h100
  text ".ProjectRevision" at 0,-1000 h100
Bottom Paste:
  text ".Layer_Name" at 0,-600 h100
  text ".ProjectTitle" at 0,-800 h100
  text ".ProjectRevision" at 0,-1000 h100
Top Solder:
  text ".Layer_Name" at 0,-600 h100
  text ".ProjectTitle" at 0,-800 h100
  text ".ProjectRevision" at 0,-1000 h100
Bottom Solder:
  text ".Layer_Name" at 0,-600 h100
  text ".ProjectTitle" at 0,-800 h100
  text ".ProjectRevision" at 0,-1000 h100
Drill Guide:
  text ".Layer_Name" at 0,-600 h100
  text ".ProjectTitle" at 0,-800 h100
  text ".ProjectRevision" at 0,-1000 h100
Title Block:
  lines w5: -450,-574 -250,-574 ; -450,1298 -250,1298 ; -450,3178 -250,3178 ; 1926,-2450 1926,-2250 ; 4298,-2450 4298,-2250 ; 4298,4850 4298,5050 ; 4350,-1950 8850,-1950 ; 4350,-1650 8850,-1650 ; 4350,-1350 5850,-1350 ; 5850,-2250 5850,-1650 5850,-1050 ; 6675,-2450 6675,-2250 ; 6675,4850 6675,5050 ; 7950,-2250 7950,-1950 ; 8850,-574 9050,-574 ; 8850,1298 9050,1298 ; 8850,3178 9050,3178 ; 4350,-2250 4350,-1050 ; 4350,-2250 8850,-2250 ; 4350,-2250 2950,-2250 2950,-1050 4350,-1050 ; 4350,-1050 5850,-1050 ; 5850,-1050 8850,-1050 8850,-2250 ; 8850,-2250 8850,4850 -250,4850 -250,-2250 8850,-2250 ; -450,-2450 9050,-2450 9050,5050 -450,5050 -450,-2450
  lines w9: 4060,4229.5 8690,4229.5 ; 4060,4390.2 8690,4390.2 ; 4000,2702 ccw(c4052,2702) 4052,2650 8698,2650 ccw(c8698,2702) 8750,2702 8750,4698 ccw(c8698,4698) 8698,4750 4052,4750 ccw(c4052,4698) 4000,4698 4000,2702
  text "3" at 5457,4915 h70
  text "4" at 7832.35,4915 h70
  text "Layer Stack Up Detail for: minna_pcb.PcbDoc" at 4060,4490.6 h105
  text "Layer" at 4060,4330.2 h37
  text "Gerber" at 5057.38,4330.2 h37
  text "Copper" at 5549.59,4330.2 h37
  text "Dielectric" at 6102.21,4330.2 h37
  text "Dielectric" at 6680.73,4330.2 h37
  text "Dielectric" at 7418.2,4330.2 h37
  text "Dielectric" at 7996.71,4330.2 h37
  text "Name" at 4060,4256.2 h37
  text "Document" at 5057.38,4256.2 h37
  text "Thickness" at 5549.59,4256.2 h37
  text "Height" at 6102.21,4256.2 h37
  text "Material" at 6680.73,4256.2 h37
  text "Constant" at 7418.2,4256.2 h37
  text "Type" at 7996.71,4256.2 h37
  text "Top Solder Mask" at 4060,4110.42 h52
  text "(.GTS)" at 5057.38,4110.42 h52
  text "0.4mil" at 6102.21,4110.42 h52
  text "Solder Resist" at 6680.73,4110.42 h52
  text "3.50" at 7418.2,4110.42 h52
  text "A" at -375,4025 h70
  text "A" at 8920,4025 h70
  text "Top Layer" at 4060,3881.25 h52
  text "(.GTL)" at 5057.38,3881.25 h52
  text "2.1mil" at 5549.59,3881.25 h52
  text "14mil" at 6102.21,3766.67 h52
  text "FR-4" at 6680.73,3766.67 h52
  text "4.20" at 7418.2,3766.67 h52
  text "Core" at 7996.71,3766.67 h52
  text "Power Plane" at 4060,3652.08 h52
  text "(.GP1)" at 5057.38,3652.08 h52
  text "0.7mil" at 5549.59,3652.08 h52
  text "28mil" at 6102.21,3537.5 h52
  text "FR-4" at 6680.73,3537.5 h52
  text "4.20" at 7418.2,3537.5 h52
  text "PrePreg" at 7996.71,3537.5 h52
  text "Ground Plane" at 4060,3422.92 h52
  text "(.GP2)" at 5057.38,3422.92 h52
  text "0.7mil" at 5549.59,3422.92 h52
  text "14mil" at 6102.21,3308.33 h52
  text "FR-4" at 6680.73,3308.33 h52
  text "4.20" at 7418.2,3308.33 h52
  text "Core" at 7996.71,3308.33 h52
  text "Bottom Layer" at 4060,3193.75 h52
  text "(.GBL)" at 5057.38,3193.75 h52
  text "2.1mil" at 5549.59,3193.75 h52
  text "Bottom Solder Mask" at 4060,2964.58 h52
  text "(.GBS)" at 5057.38,2964.58 h52
  text "0.4mil" at 6102.21,2964.58 h52
  text "Solder Resist" at 6680.73,2964.58 h52
  text "3.50" at 7418.2,2964.58 h52
  text "ALL HOLES INDICATE FINISHED SIZE" at 4008,2508 h60
  text "MATERIAL ->" at 4008,2208 h60
  text "B" at -375,2149 h70
  text "B" at 8920,2149 h70
  text "MATERIAL: EPOXY FIBERGLASS FR4 TG170 OR EQUIVALENT," at 4108,2108 h60
  text "LAMINATE AND PREPREG (B-STAGE) TO BE IN ACCORDANCE WITH IPC-4101/24 OR IPC-4101/26." at 4108,2008 h60
  text "MATERIAL MUST MEET UL 94V-0 FLAMABILITY RATING." at 4108,1908 h60
  text "ACCEPTABILITY REQUIREMENTS PER IPC-A-600E." at 4108,1808 h60
  text "0.062\"" at 6208,1808 h60
  text "+/- 0.007\" FINISHED THICKNESS." at 6508,1808 h60
  text "THIS IS A 4 LAYER BOARD." at 4108,1708 h60
  text "FINISH ->" at 4008,1558 h60
  text "FINISHED COPPER THICKNESS TO BE" at 4108,1408 h60
  text "1.0" at 5658,1408 h60
  text "oz. EXTERNAL LAYERS," at 5808,1408 h60
  text "0.5" at 6808,1408 h60
  text "oz. INTERNAL LAYERS (MULTI-LAYERED)" at 6958,1408 h60
  text "SOLDER MASK OVER BARE COPPER, BOTH SIDES, L.P.I., VIOLET IN COLOR. 0.002\" MAX THICKNESS" at 4108,1308 h60
  text "ALL EXPOSED CONDUCTIVE PATTERN AREAS NOT COVERED WITH SOLDERMASK OR OTHER PLATING" at 4108,1208 h60
  text "SHALL BE IMMERSION GOLD FINISH." at 4108,1108 h60
  text "SILKSCREEN SHALL BE WHITE, PERMANENT, ORGANIC, NON-CONDUCTIVE INK." at 4108,1008 h60
  text "THERE SHALL BE NO SILKSCREEN ON ANY SOLDERABLE COMPONENT PAD." at 4108,908 h60
  text "UL LOGO, MANUFACTURER'S IDENTIFICATION AND DATE CODE LETTER SHALL BE RENDERED IN ETCH ON" at 4108,808 h60
  text "THE TOP SIDE OF THE BOARD" at 4108,708 h60
  text "TOLERANCES ->" at 4008,558 h60
  text "WARP OR TWIST OF BOARD SHALL NOT EXCEED 1%." at 4108,408 h60
  text "CONDUCTOR WIDTHS AND SPACING SHALL BE WITHIN +/- 0.001\" OF GERBER DATA." at 4108,308 h60
  text "C" at -375,273 h70
  text "C" at 8920,273 h70
  text "HOLE LOCATION +/- 0.003\". MAXIMUM LAYER TO LAYER MIS-REGISTRAION SHALL BE 0.005\"" at 4108,208 h60
  text "HOLE DIAMETER TOLERANCE IS +/- 0.003\" AFTER PLATING" at 4108,108 h60
  text "REMOVE ALL BURRS AND BREAK SHARP EDGES 0.015\" MAXIMUM." at 4108,8 h60
  text "SURFACE MOUNT PAD PLATING MUST BE FLAT TO A MAXIMUM OF 0.08 (0.003\") ABOVE BOARD SURFACE." at 4108,-92 h60
  text "MINIMUM COPPER PLATING 0.001\" THICK FOR PLATED THROUGH HOLES." at 4108,-192 h60
  text "ENGINEER:" at 4400,-1150 h45
  text "PROJECT TITLE:" at 5900,-1150 h45
  text ".ProjectAuthor" at 4450,-1270 h70
  text "PCB DESIGNER:" at 4400,-1445 h45
  text ".ProjectTitle" at 6100,-1500 h150
  text ".ProjectAuthor" at 4450,-1570 h70
  text "D" at -375,-1599 h70
  text "D" at 8920,-1599 h70
  text "DATE:" at 4400,-1750 h45
  text "COMPANY NAME:" at 5900,-1750 h45
  text ".Print_Date" at 4450,-1870 h70
  text ".CompanyName" at 5950,-1870 h70
  text "FILE NAME:" at 4400,-2050 h45
  text "COMPANY EMAIL:" at 5900,-2050 h45
  text "REVISION:" at 8000,-2050 h45
  text ".Pcb_File_Name_No_Path" at 4450,-2170 h70
  text ".CompanyEmail" at 5950,-2170 h70
  text ".ProjectRevision" at 8050,-2170 h70
  text "1" at 722.34,-2385 h70
  text "2" at 3080.35,-2385 h70
  text "3" at 5457,-2385 h70
  text "4" at 7832.35,-2385 h70
Board Outline:
  the board outline again, w7.87
Component Body:
  text ".Layer_Name" at 0,-600 h100
  text ".ProjectTitle" at 0,-800 h100
  text ".ProjectRevision" at 0,-1000 h100
Assembly Top:
  text ".Layer_Name" at 0,-150 h80
  text ".ProjectTitle" at 0,-300 h80
  text ".ProjectRevision" at 0,-450 h80
  text ".Print_Date" at 0,-600 h80
  text "Not To Scale" at 0,-750 h80
Assembly Bottom:
  text ".Layer_Name" at 3700,-150 h80
  text ".ProjectTitle" at 3700,-300 h80
  text ".ProjectRevision" at 3700,-450 h80
  text ".Print_Date" at 3700,-600 h80
  text "Not To Scale" at 3700,-750 h80
Courtyard Top:
  text ".Layer_Name" at 0,-600 h100
  text ".ProjectTitle" at 0,-800 h100
  text ".ProjectRevision" at 0,-1000 h100
Courtyard Bottom:
  text ".Layer_Name" at 0,-600 h100
  text ".ProjectTitle" at 0,-800 h100
  text ".ProjectRevision" at 0,-1000 h100
Drill Drawing:
  the board outline again, w7.87
  text ".Legend" at 100,2800 h60
  text ".Layer_Name" at 0,-600 h100
  text ".ProjectTitle" at 0,-800 h100
  text ".ProjectRevision" at 0,-1000 h100

## Dimensions
0,2200 to 3400,2200 on Drill Drawing
0,0 to 0,2200 on Drill Drawing
0,2200 to 3700,2110 on Drill Drawing

## Text inside footprints (layer, text, board x,y; h text height)
J2: Bottom Overlay "21" at 3370,125 h48; Bottom Overlay "40" at 3370,2025 h48; Top Overlay "1" at 3355,2025 h48; Top Overlay "20" at 3290,200 h48